# EAGLE board Bulk Board2 (EAGLE 8.4.1)
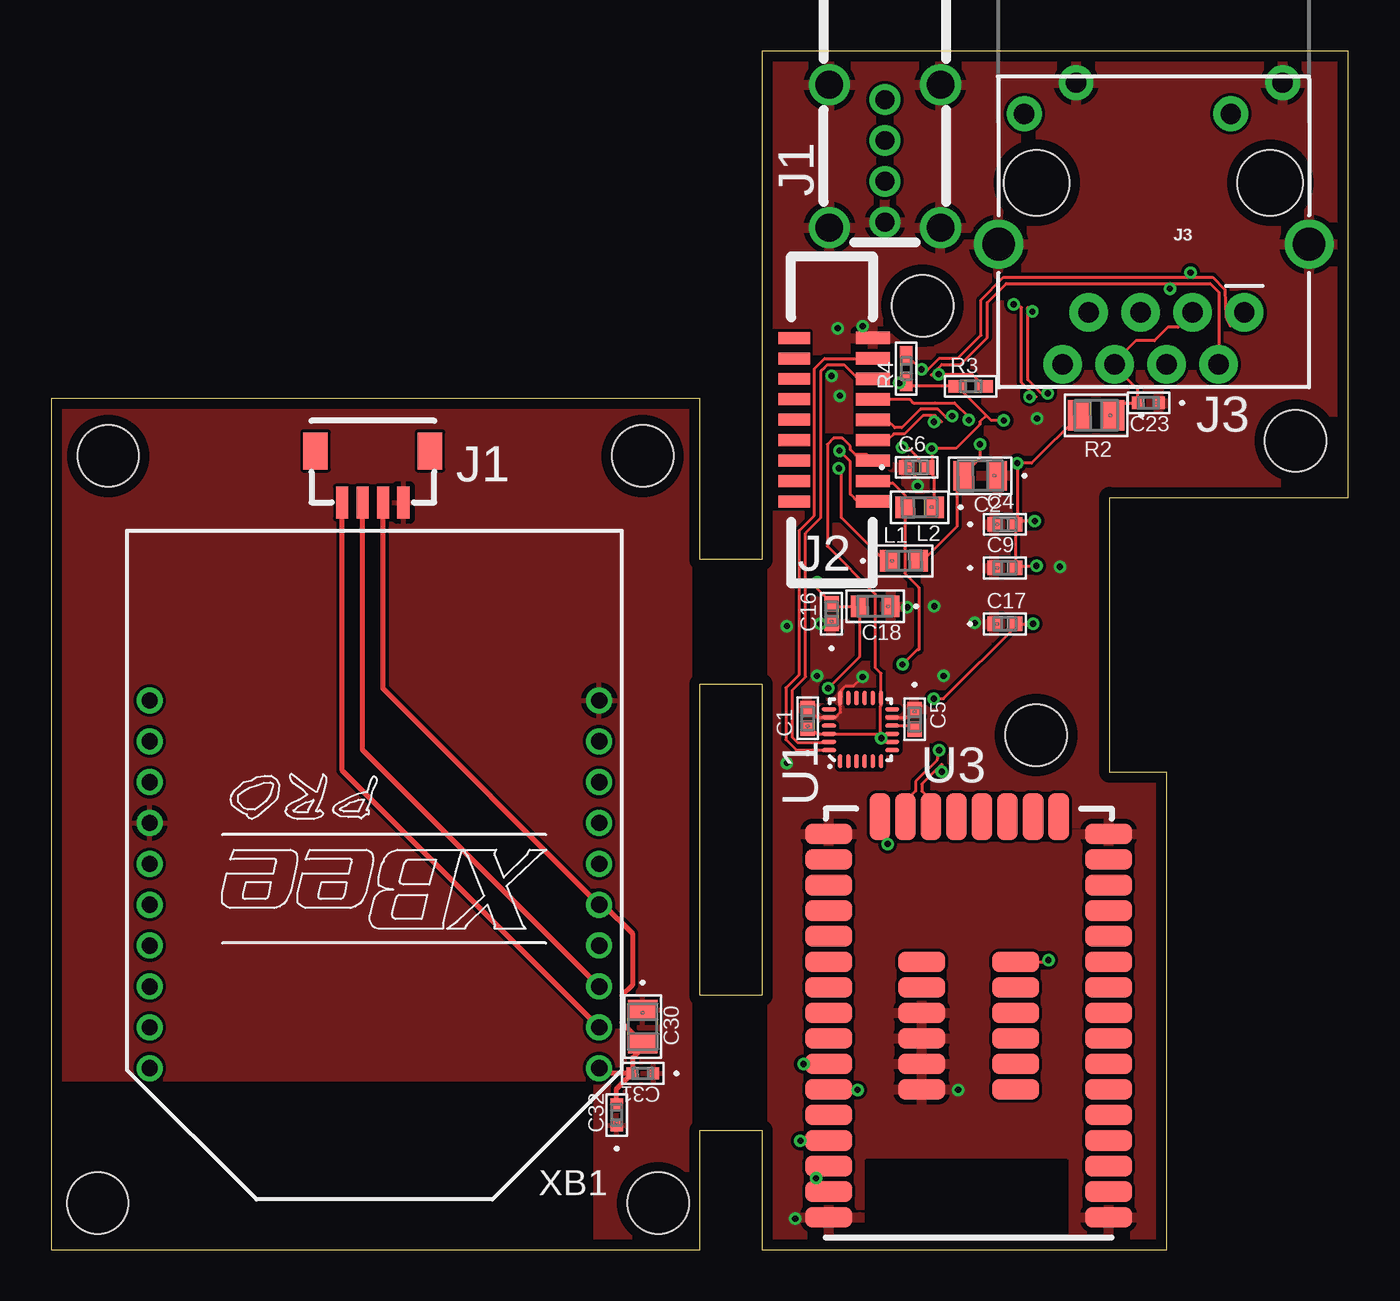
[diagram p0: board, top side]
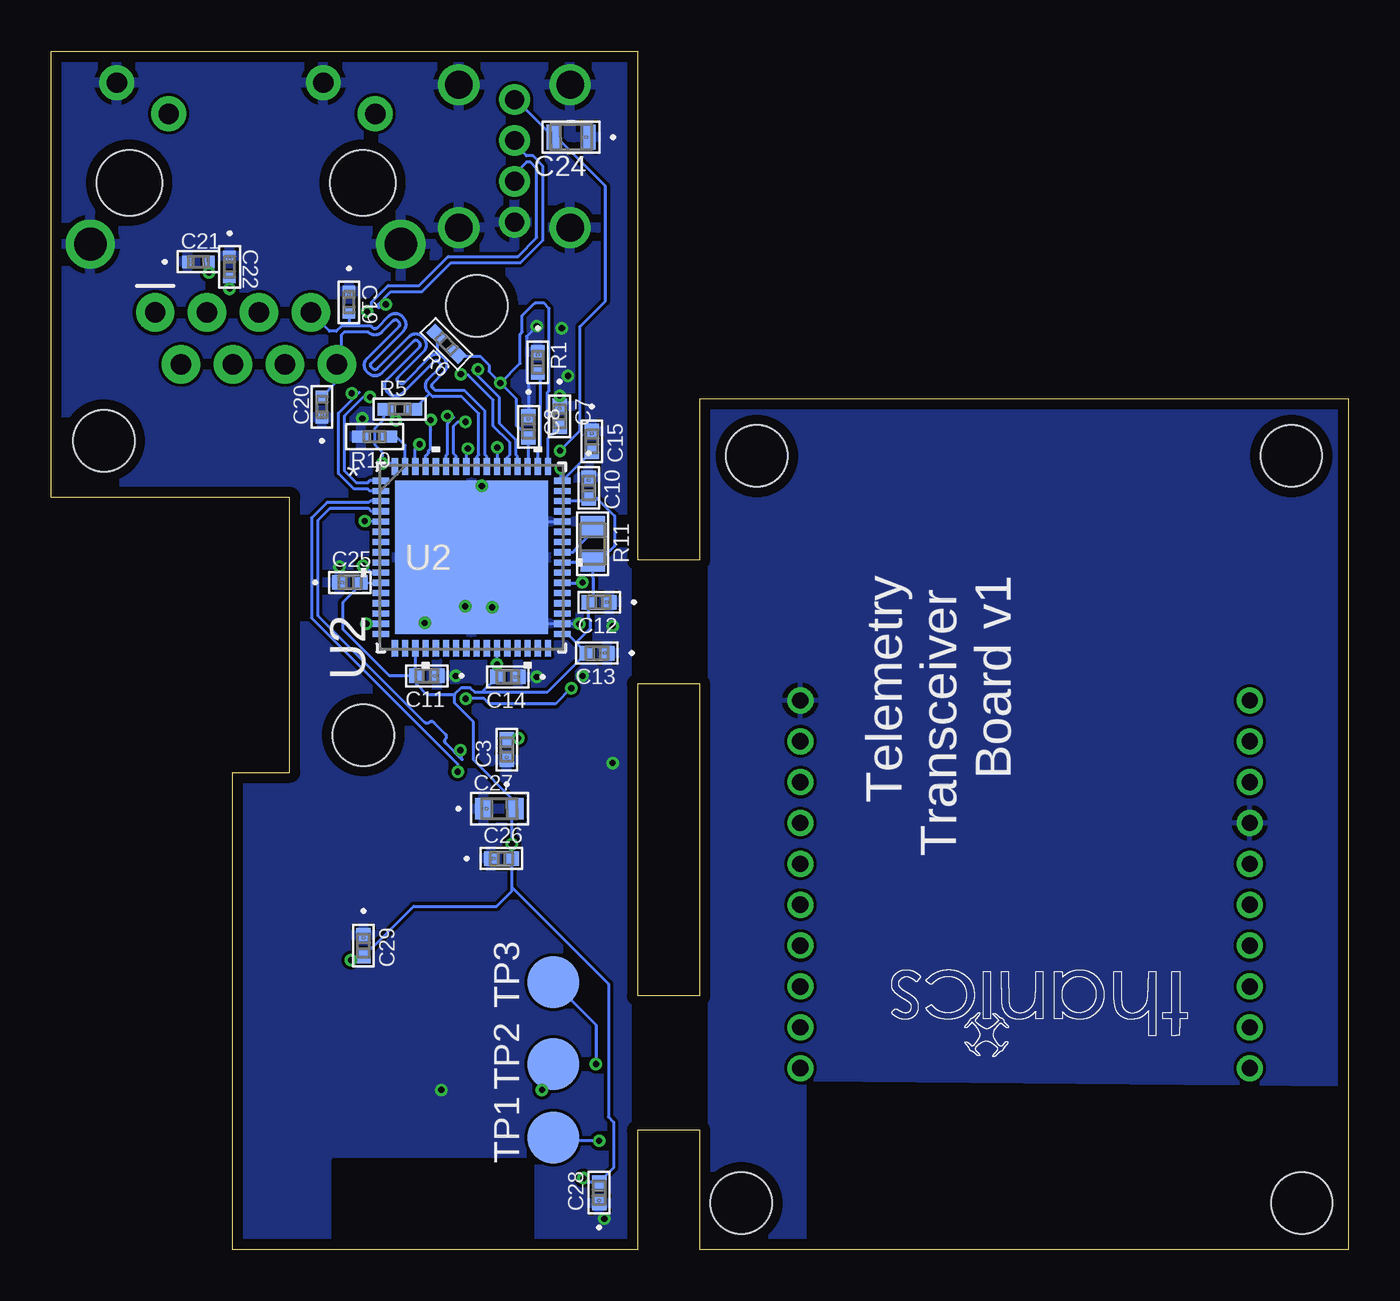
[diagram p1: board, bottom side, seen from below]

Size 63.5 x 58.67 mm. Coordinates in mm from the lower left corner, seen from the top.
Outline: 0,0 31.75,0 31.75,5.84 34.8,5.84 34.8,0 54.61,0 54.61,23.37 51.82,23.37 51.82,36.83 63.5,36.83 63.5,58.67 34.8,58.67 34.8,33.78 31.75,33.78 31.75,41.66 0,41.66 0,0
Outline: 31.75,27.69 34.8,27.69 34.8,12.45 31.75,12.45 31.75,27.69
Copper layers (1*16): Top 0.035mm / dielectric 1.6mm / Bottom 0.035mm
Design rules "Elecrow_2-layer_PCB_eagle_rule": minimum track width 6mil, minimum drill 12mil, track to track 6mil, track to pad 6mil, pad to pad 6mil, via to via 8mil, smd to smd 0mil, copper to edge 20mil, drill to drill 10mil, minimum pad ring 6mil, minimum via ring 6mil, stop-mask expansion 0mil, vias tented up to drill 100mil, thermal gap 10mil
Holes 3 mm at 60.92,39.6 42.65,46.21 48.22,25.19 2.79,38.86 28.96,38.86 29.72,2.29 2.29,2.29
tRestrict: area 39.9,0 to 49.7,4.4; area 0.3,0.3 to 26.4,8.1
bRestrict: area 39.9,0 to 49.7,4.4; area 0.3,0.3 to 26.4,8.1

## Footprints (pad centres in the part's own frame; a part is rotated, then mirrored left to right if it is on the bottom)
0402-M = smd 0.711 x 0.711: 1 -0.508,0; 2 0.508,0
YAG_CC0805 = smd 0.965 x 1.448: 1 -0.826,0; 2 0.826,0
0603-M = smd 0.813 x 1.067: 1 -0.775,0; 2 0.775,0
G-155-M = smd 0.559 x 0.61: 1 -0.521,0; 2 0.521,0
G-21 = smd 0.711 x 1.245: 1 -0.851,0; 2 0.851,0
USB_A_VERTICAL = drill 0.92 pad 1.5: 1 -3,0; 2 -1,0; 3 1,0; 4 3,0 | drill 1.35 pad 2: P$5 -3.73,-2.72; P$6 -3.73,2.72; P$7 3.27,2.72; P$8 3.27,-2.72
9POS_FFC_CONNECTOR = smd 0.6 x 1.65: 1 -7.27,-2; 2 -6.27,-2; 3 -5.27,-2; 4 -4.27,-2; 5 -3.27,-2; 6 -2.27,-2; 7 -1.27,-2; 8 -0.27,-2; 9 0.73,-2 | smd 0.584 x 1.524: P$16 -7.27,1.852; P$17 -6.27,1.852; P$18 -5.27,1.852; P$19 -4.27,1.852; P$20 -3.27,1.852; P$21 -2.27,1.852; P$22 -1.27,1.852; P$23 -0.27,1.852; P$24 0.73,1.852
MAGJACK = drill 1 pad 1.88: 1 -4.445,6.015; 2 -3.175,8.555; 3 -1.905,6.015; 4 -0.635,8.555; 5 0.635,6.015; 6 1.905,8.555; 7 3.175,6.015; 8 4.445,8.555 | drill 1 pad 1.7: 9 -3.785,-3.715; 10 -6.325,-5.235; 11 6.325,-3.715; 12 3.785,-5.235 | drill 1.6 pad 2.184: M1 -7.62,2.67; M2 7.58,2.67 | hole 3.2: -5.715,-0.335; 5.715,-0.335
JST_SH_4POS = smd 0.6 x 1.55: 1 -1.5,0; 2 -0.5,0; 3 0.5,0; 4 1.5,0 | smd 1.2 x 1.8: P$5 -2.8,2.525; P$6 2.8,2.525
IND_BLM18_0603-M = smd 0.914 x 1.041: 1 -0.724,0; 2 0.724,0
YAG_R0402-M = smd 0.66 x 0.66: 1 -0.508,0; 2 0.508,0
STA_RNCP0805-M = smd 1.118 x 1.499: 1 -0.826,0; 2 0.826,0
RC0402N-M = smd 0.864 x 0.61: 1 -0.66,0; 2 0.66,0
RC0805N = smd 1.006 x 1.2: 1 -0.853,0; 2 0.853,0
B2,54 = smd 2.54 x 2.54: TP 0,0
QFN40P300X300X105-25N = smd 0.7 x 0.2: 1 -1.55,1; 2 -1.55,0.6; 3 -1.55,0.2; 4 -1.55,-0.2; 5 -1.55,-0.6; 6 -1.55,-1; 13 1.55,-1; 14 1.55,-0.6; 15 1.55,-0.2; 16 1.55,0.2; 17 1.55,0.6; 18 1.55,1 | smd 0.2 x 0.7: 7 -1,-1.55; 8 -0.6,-1.55; 9 -0.2,-1.55; 10 0.2,-1.55; 11 0.6,-1.55; 12 1,-1.55; 19 1,1.55; 20 0.6,1.55; 21 0.2,1.55; 22 -0.2,1.55; 23 -0.6,1.55; 24 -1,1.55
QFN64_9X9MC-M = smd 0.813 x 0.305: 1 -4.445,3.75; 2 -4.445,3.25; 3 -4.445,2.75; 4 -4.445,2.25; 5 -4.445,1.75; 6 -4.445,1.25; 7 -4.445,0.75; 8 -4.445,0.25; 9 -4.445,-0.25; 10 -4.445,-0.75; 11 -4.445,-1.25; 12 -4.445,-1.75; 13 -4.445,-2.25; 14 -4.445,-2.75; 15 -4.445,-3.25; 16 -4.445,-3.75; 33 4.445,-3.75; 34 4.445,-3.25; 35 4.445,-2.75; 36 4.445,-2.25; 37 4.445,-1.75; 38 4.445,-1.25; 39 4.445,-0.75; 40 4.445,-0.25; 41 4.445,0.25; 42 4.445,0.75; 43 4.445,1.25; 44 4.445,1.75; 45 4.445,2.25; 46 4.445,2.75; 47 4.445,3.25; 48 4.445,3.75 | smd 0.305 x 0.813: 17 -3.75,-4.445; 18 -3.25,-4.445; 19 -2.75,-4.445; 20 -2.25,-4.445; 21 -1.75,-4.445; 22 -1.25,-4.445; 23 -0.75,-4.445; 24 -0.25,-4.445; 25 0.25,-4.445; 26 0.75,-4.445; 27 1.25,-4.445; 28 1.75,-4.445; 29 2.25,-4.445; 30 2.75,-4.445; 31 3.25,-4.445; 32 3.75,-4.445; 49 3.75,4.445; 50 3.25,4.445; 51 2.75,4.445; 52 2.25,4.445; 53 1.75,4.445; 54 1.25,4.445; 55 0.75,4.445; 56 0.25,4.445; 57 -0.25,4.445; 58 -0.75,4.445; 59 -1.25,4.445; 60 -1.75,4.445; 61 -2.25,4.445; 62 -2.75,4.445; 63 -3.25,4.445; 64 -3.75,4.445 | smd 7.493 x 7.493: 65 0,0
WGM110A = smd 2.3 x 1: 1 -6.85,0; 2 -6.85,-1.25; 3 -6.85,-2.5; 4 -6.85,-3.75; 5 -6.85,-5; 6 -6.85,-6.25; 7 -6.85,-7.5; 8 -6.85,-8.75; 9 -6.85,-10; 10 -6.85,-11.25; 11 -6.85,-12.5; 12 -6.85,-13.75; 13 -6.85,-15; 14 -6.85,-16.25; 15 -6.85,-17.5; 16 -6.85,-18.75; 25 6.85,-18.75; 26 6.85,-17.5; 27 6.85,-16.25; 28 6.85,-15; 29 6.85,-13.75; 30 6.85,-12.5; 31 6.85,-11.25; 32 6.85,-10; 33 6.85,-8.75; 34 6.85,-7.5; 35 6.85,-6.25; 36 6.85,-5; 37 6.85,-3.75; 38 6.85,-2.5; 39 6.85,-1.25; 40 6.85,0; 41 -2.3,-6.25; 42 2.3,-6.25; 43 -2.3,-7.5; 44 2.3,-7.5; 45 -2.3,-8.75; 46 2.3,-8.75; 47 -2.3,-10; 48 2.3,-10; 49 -2.3,-11.25; 50 2.3,-11.25; 51 -2.3,-12.5; 52 2.3,-12.5 | smd 1 x 2.3: 17 -4.4,-19.6; 18 -3.15,-19.6; 19 -1.9,-19.6; 20 -0.65,-19.6; 21 0.6,-19.6; 22 1.85,-19.6; 23 3.1,-19.6; 24 4.35,-19.6
XBEE-PRO = drill 0.8 pad 1.27: 1 -11,9; 2 -11,7; 3 -11,5; 4 -11,3; 5 -11,1; 6 -11,-1; 7 -11,-3; 8 -11,-5; 9 -11,-7; 10 -11,-9; 11 11,-9; 12 11,-7; 13 11,-5; 14 11,-3; 15 11,-1; 16 11,1; 17 11,3; 18 11,5; 19 11,7; 20 11,9

## Placement (x,y rotation side)
C1  0.1uF  [0402-M]  37.03,26.01 90 top
C2  1uF  [YAG_CC0805]  45.48,37.89 180 top
C3  0.1uF  [0402-M]  41.2,24.49 90 bottom
C4  0.1uF  [0402-M]  46.69,35.51 0 top
C5  0.1uF  [0402-M]  42.27,25.96 270 top
C6  0.1uF  [0402-M]  42.37,38.3 0 top
C7  0.1uF  [0402-M]  38.61,40.79 270 bottom
C8  0.1uF  [0402-M]  40.13,40.28 270 bottom
C9  0.1uF  [0402-M]  46.69,33.38 0 top
C10  0.1uF  [0402-M]  37.19,37.29 270 bottom
C11  0.1uF  [0402-M]  45.11,28.09 180 bottom
C12  0.1uF  [0402-M]  36.68,31.7 180 bottom
C13  0.1uF  [0402-M]  36.78,29.21 180 bottom
C14  0.1uF  [0402-M]  41.15,28.04 180 bottom
C15  0.1uF  [0402-M]  37.03,39.57 270 bottom
C16  0.1uF  [0402-M]  38.2,31.14 90 top
C17  0.1uF  [0402-M]  46.69,30.63 0 top
C18  4.7uF  [0603-M]  40.34,31.5 180 top
C19  16pF  [G-155-M]  48.92,46.38 270 bottom
C20  16pF  [G-155-M]  50.24,41.25 90 bottom
C21  16pF  [G-155-M]  56.29,48.36 0 bottom
C22  16pF  [G-155-M]  54.76,48.11 270 bottom
C23  22nF  [G-155-M]  53.71,41.45 180 top
C24  22uF  [G-21]  38.05,54.46 180 bottom
C25  0.1uF  [0402-M]  48.87,32.66 0 bottom
C26  0.1uF  [0402-M]  41.45,19.15 0 bottom
C27  4.7uF  [0603-M]  41.55,21.59 0 bottom
C28  0.1uF  [0402-M]  36.68,2.79 90 bottom
C29  0.1uF  [0402-M]  48.21,14.88 270 bottom
C30  1uF  [YAG_CC0805]  28.96,10.92 270 top
C31  16pF  [G-155-M]  28.96,8.64 180 top
C32  16pF  [G-155-M]  27.69,6.6 90 top
J1  [USB_A_VERTICAL]  40.82,53.3 270 top
J2  [9POS_FFC_CONNECTOR]  38.22,43.9 90 top
J3  MAGJACK  [MAGJACK]  53.96,51.89 180 top
J4  [JST_SH_4POS]  15.75,36.58 0 top
L1  FB  [IND_BLM18_0603-M]  41.74,33.72 0 top
L2  FB  [IND_BLM18_0603-M]  42.51,36.35 180 top
R1  12.4k  [YAG_R0402-M]  39.67,43.43 270 bottom
R2  10R  [STA_RNCP0805-M]  51.16,40.84 180 top
R3  49R9  [RC0402N-M]  45.01,42.27 0 top
R4  49R9  [RC0402N-M]  41.86,43.13 90 top
R5  49R9  [RC0402N-M]  46.43,41.15 0 bottom
R6  49R9  [RC0402N-M]  44.15,44.35 135 bottom
R10  12k  [RC0402N-M]  47.66,39.8 180 bottom
R11  10k  [RC0805N]  36.99,34.55 270 bottom
TP1  TPB2,54  [B2,54]  38.92,5.5 90 bottom
TP2  TPB2,54  [B2,54]  38.92,9.1 90 bottom
TP3  TPB2,54  [B2,54]  38.92,13.1 90 bottom
U1  [QFN40P300X300X105-25N]  39.62,25.46 90 top
U2  [QFN64_9X9MC-M]  42.92,33.89 0 bottom
U3  WGM110A  [WGM110A]  44.92,1.6 180 top
XB1  XBEE-PRO  [XBEE-PRO]  15.83,17.89 180 top

## Library data of the parts
C1 C3-C17 C25 C26 C28 C29 = 0.1uF-capacitor-0402; MANUFACTURER_PART_NUMBER: 0402ZD104KAT2A; VENDOR: AVX Corporation
C2 = 1uF X7R Ceramic Capacitor; COPYRIGHT: Copyright C 2015 Accelerated Designs. All rights reserved; MANUFACTURER_PART_NUMBER: CC0805KKX7R7BB105; VENDOR: Vendor
C18 C27 = 4.7uF-capacitor; MANUFACTURER_PART_NUMBER: 06036D475KAT2A; VENDOR: AVX Corporation
C19-C22 = 16pF-capacitor; MANUFACTURER_PART_NUMBER: GRM1555C1H160JA01D; VENDOR: Murata
C23 = 22nF-capacitor; MANUFACTURER_PART_NUMBER: GRM155R71H223KA12D; VENDOR: Murata
C24 = 22uF X5R Ceramic Capacitor; COPYRIGHT: Copyright C 2015 Accelerated Designs. All rights reserved; MANUFACTURER_PART_NUMBER: GRM21BR60J226ME39L; VENDOR: Vendor
C30 = Telemetry Transceiver Board; COPYRIGHT: Copyright C 2015 Accelerated Designs. All rights reserved; MANUFACTURER_PART_NUMBER: CC0805KKX7R7BB105; VENDOR: Vendor
C31 C32 = Telemetry Transceiver Board; MANUFACTURER_PART_NUMBER: GRM1555C1H160JA01D; VENDOR: Murata
J1 J2 J4 U3 = thanics_robotics
J3 = SparkFun-Connectors; PROD_ID: CONN-09556; SF_ID: PRT-08534
L1 L2 = 600ohm-fb; MANUFACTURER_PART_NUMBER: BLM18AG601SN1D; VENDOR: MURATA
R1 = 12.4k-resistor; MANUFACTURER_PART_NUMBER: RC0402FR0712K4L; VENDOR: Yageo
R2 = 10-resistor; COPYRIGHT: Copyright C 2015 Accelerated Designs. All rights reserved; MANUFACTURER_PART_NUMBER: RNCP0805FTD10R0; VENDOR: Vendor
R3-R6 = 49.9-resistor; MANUFACTURER_PART_NUMBER: RC0402FR0749K9L; VENDOR: Yageo
R10 = 12k-resistor; MANUFACTURER_PART_NUMBER: RC0402FR0712KL; VENDOR: Yageo
R11 = 10k-resistor; CASE: 0805 2012 metric; COMPOSITION: Thin Film; COPYRIGHT: Copyright C 2015 Accelerated Designs. All rights reserved; DATASHEET: httpindustrial.panasonic.comwwwcgijvcr13pz.cgi?E+PZ+3+AOA0026+ERA6AEB103V+7+WW; DIGIKEYPARTNUMBER: P10KDATRND; HEIGHT: 0.024" 0.60mm; LEADSTYLE: Surface Mount SMD SMT; MANUFACTURER_PART_NUMBER: ERA6AEB103V; NUMBEROFTERMINATIONS: 2; PACKAGECASE: 0805 2012 Metric; PACKAGING: Tape &amp Reel TR; POWERWATTS: 0.125W 18W; QUANTITY_AVAILABLE: 225000; RESISTANCEINOHMS: 10.0K; RESISTANCEOHMS: 10K; SIZEDIMENSION: 0.079" L x 0.049" W 2.00mm x 1.25mm; TEMPERATURECOEFFICIENT: 25ppm°C; TOLERANCE: 0.1%; VENDOR: Panasonic; VOLTAGEWORKING: 100V
TP1-TP3 = testpad
U1 = ICM-20948-mpu
U2 = lan9512; MANUFACTURER_PART_NUMBER: LAN9512JZX; VENDOR: MICROCHIP
XB1 = xbee; MPN: XBP24-AWI-001; OC_FARNELL: 1337916; OC_NEWARK: 42M2667

## Nets
1.8V: C1.1 C3.2 J2.3 U1.8 U1.9 U1.13 U1.22
3.3V_A: C4.2 C6.2 C7.2 C8.2 C9.2 L2.1 R2.2 R3.1 R4.1 R5.1 R6.1 U2.5 U2.10 U2.49 U2.51 U2.54 U2.57 U2.64
+3V1: C30.2 C31.2 C32.2 J4.3 XB1.1 XB1.5
+3V3: C10.2 C11.2 C12.2 C13.2 C14.2 C25.2 C26.2 C27.2 C28.2 C29.2 J2.2 L2.2 R11.2 U2.11 U2.12 U2.19 U2.27 U2.33 U2.39 U2.40 U2.46 U3.24 U3.38 U3.39 U3.51
+5V: C24.2 J1.1 J2.1
GND: C1.2 C2.1 C3.1 C4.1 C5.1 C6.1 C7.1 C8.1 C9.1 C10.1 C11.1 C12.1 C13.1 C14.1 C15.1 C16.1 C17.1 C18.1 C19.1 C20.1 C21.1 C22.1 C23.1 C24.1 C25.1 C26.1 C27.1 C28.1 C29.1 J1.4 J1.P$5 J1.P$6 J1.P$7 J1.P$8 J2.9 J3.10 J3.12 J3.M1 J3.M2 R1.1 R10.2 U1.11 U1.18 U1.20 U2.34 U2.44 U2.65 U3.1 U3.16 U3.25 U3.40 U3.42 U3.44 U3.46 U3.48
GND1: C30.1 C31.1 C32.1 J4.4 XB1.10 XB1.14
GPCLK: J2.6 U2.61
N$1: R11.1 U2.41
N$2: R10.1 U2.63
N$3: C15.2 L1.1 U2.48
N$4: C2.2 L1.2 U2.62
N$7: TP1.TP U3.37
N$8: TP2.TP U3.35
N$9: TP3.TP U3.34
N$10: J3.11
N$11: C5.2 U1.10
N$12: J3.9
N$14: R1.2 U2.50
N$15: C16.2 C17.2 C18.2 U2.15 U2.38
N$16: C23.2 J3.3 J3.6 R2.1
RX: J4.2 XB1.3
RX_N: C22.2 J3.2 R3.2 U2.53
RX_P: C21.2 J3.1 R4.2 U2.52
SCL: J2.7 U1.23
SDA: J2.8 U1.24
TX: J4.1 XB1.2
TX_N: C20.2 J3.8 R5.2 U2.56
TX_P: C19.2 J3.7 R6.2 U2.55
USB_D2_N: J1.2 U2.1
USB_D2_P: J1.3 U2.2
USB_D3_N: U2.3 U3.22
USB_D3_P: U2.4 U3.23
USB_D_N: J2.4 U2.58
USB_D_P: J2.5 U2.59

## Tracks (layer width: path | path; a pad name or v marks a point on that pad's centre or on a via)
1.8V  (via drill 0.3)
  Top 0.152: v40.64,25.04 40.83,24.86 U1.8 | U1.9 40.85,25.26 v40.64,25.04 | 40.59,25.25 40.59,26.59 40.62,26.62 U1.13 40.62,28.21 40.34,28.5 40.34,32.11 38,34.44 38,39.42 38.3,39.73 38.73,39.73 39.12,39.34 39.12,39.16 39.37,38.91 39.94,38.91 J2.3 | 40.59,25.25 40.59,25.09 v40.64,25.04 | C1.1 37.24,25.5 37.49,25.25 38.06,25.25 U1.22 40.58,25.26 40.59,25.25
  Bottom 0.152: C3.2 41.15,25.04 v40.64,25.04
3.3V_A  (via drill 0.3)
  Top 0.152: C6.2 42.77,38.3 43.24,37.84 L2.1 | C6.2 43.1,38.58 v43.1,39.22 44.28,39.22 45.46,40.39 45.46,40.53 45.77,40.84 | C4.2 47.3,35.61 v47.3,38.51 47.99,38.51 R2.2 | v48.15,35.67 47.35,35.67 C4.2 | C4.2 C9.2 47.3,33.48 v48.23,33.48 | 41.88,42.45 42.11,42.27 R3.1 45.77,40.84 | 41.88,42.45 R4.1 | C6.2 42.44,38.73 42.44,38.75 41.93,39.27 v41.66,39.27 | v41.51,42.43 41.86,42.43 41.88,42.45 | v46.63,40.59 46.02,40.59 45.77,40.84
  Bottom 0.152: U2.51 40.13,38.38 C8.2 40.56,40.21 40.58,40.21 40.72,40.34 40.72,41.63 v41.51,42.43 | U2.54 41.67,39.25 v41.66,39.27 | U2.57 43.17,39.15 v43.1,39.22 | U2.64 46.84,38.51 v47.3,38.51 47.3,39.04 47.66,39.41 47.66,40.2 47.24,40.62 R5.1 47.09,41.05 v46.63,40.59 | U2.5 48.12,35.64 v48.15,35.67 | v41.51,42.43 42.07,42.99 42.07,43.31 42.49,43.73 43.53,43.73 R6.1 | v48.23,33.48 48,33.25 47.91,33.25 47.81,33.14 U2.10 | U2.49 39.17,39.72 39.12,39.78 | 39.12,39.78 C7.2 | 39.12,39.78 39.12,40.77 39.19,40.85 39.19,41.98 39.12,42.05 39.12,46.08 39.37,46.33 39.83,46.33 40.44,45.72 40.44,44.93 40.54,44.83 40.54,43.4 v41.51,42.43
+3V1
  Top 0.254: C31.2 28.45,9.4 28.96,9.91 C30.2 27.94,11.11 27.94,12.45 28.45,12.95 28.45,15.49 27.05,16.89 XB1.5 16.25,27.47 J4.3 | C32.2 27.69,7.89 C31.2 | C31.2 27.08,8.64 XB1.1
+3V3  (via drill 0.3)
  Top 0.152: J2.2 40.31,37.54 41.2,37.54 41.79,36.95 L2.2 41.79,34.34 41.78,34.34 41.78,33.1 42.47,32.42 42.47,29.36 42.38,29.36 v41.67,28.65 | U3.24 40.95,20.82 v40.95,19.86 | U3.51 48.74,14.1 v48.82,14.17 | U3.39 37.44,3.48 v37.44,3.5 37.47,3.5 U3.38
  Bottom 0.152: U2.19 45.67,28.15 C11.2 | U2.33 38.22,30.14 37.77,29.69 | 37.77,29.69 C13.2 39.22,27.28 42.42,27.28 | U2.39 U2.40 37.05,33.64 R11.2 36.99,33.63 | 37.77,29.69 37.77,29.75 37.11,30.41 37.11,30.85 37.19,30.93 C12.2 36.96,31.93 36.96,32.88 36.99,32.92 36.99,33.63 | U2.27 v41.67,28.65 41.67,28.06 C14.2 42.42,27.28 | C11.2 45.62,27.69 45.11,27.18 43.74,27.18 | C11.2 46.94,28.09 49.23,30.38 49.23,31.69 48.26,32.66 C25.2 47.4,32.61 U2.11 U2.12 | U2.46 37.32,36.64 C10.2 36.78,36.78 35.92,35.92 35.92,34.44 36.47,33.88 36.74,33.88 36.99,33.63 | v48.82,14.17 48.41,14.17 C29.2 47.78,14.81 47.76,14.81 45.75,16.82 41.71,16.82 40.95,17.58 40.95,17.73 | v37.44,3.5 37.24,3.3 C28.2 35.97,4.01 35.97,6.25 36.22,6.5 36.22,13.01 40.95,17.73 | 40.95,17.73 C26.2 v40.95,19.86 40.95,21.43 C27.2 40.78,21.93 42.82,23.98 42.82,25.84 43.74,26.75 43.74,27.18 | 42.42,27.28 42.76,27.28 42.98,27.51 43.43,27.51 43.74,27.2 43.74,27.18
+5V  (via drill 0.3)
  Top 0.152: J2.1 39.47,36.63 39.12,36.98 | 39.12,36.98 | 39.12,36.98 39.12,38.58 v38.59,39.12
  Bottom 0.152: J1.1 40.74,56.3 C24.2 38.76,54.46 36.37,52.07 36.37,46.44 37.62,45.19 37.62,40.09 v38.59,39.12
GND  (via drill 0.3)
  Top 0.152: C6.1 42.29,37.87 42.29,37.85 42.42,37.73 v42.42,37.39 | U1.11 41.86,26.06 C5.1 | C1.2 37.47,26.09 37.48,26.09 37.51,26.06 U1.20 38.38,26.06 38.65,26.32 38.65,26.59 38.62,26.62 U1.18 38.69,27.08 38.69,27.39 38.88,27.59 39.27,27.59 v39.73,28.04 | C18.1 41.16,31.45 v41.91,31.45
  Bottom 0.152: U2.65 41.17,35.64 U2.44 | U2.65 39.67,30.64 U2.34 37.65,30.64 v37.64,30.63 | U2.65 42.92,32.46 v41.91,31.45 | C7.1 v38.61,41.81 | C8.1 40.13,42.4 40.23,42.5 40.23,44.7 v39.73,45.21
  other vias: 43.69,28.09 36.02,30.53 36.02,23.83 48.26,40.69 38.51,45.11 36.42,1.52 44.4,7.82 45.21,30.68 37.49,28.09 49.38,33.43 43.23,31.5 38.2,42.77
  pour Top: 35.31,-2.65 35.31,58.35 63.42,58.6 63.42,-2.4
  pour Bottom: 35.31,-2.4 35.31,58.6 63.42,58.6 63.42,-2.4
GND1
  pour Top: 0.25,41.4 31.24,41.4 31.24,0.25 0.25,0.25
  pour Bottom: 0.25,41.4 31.24,41.4 31.24,0.25 0.25,0.25
GPCLK  (via drill 0.3)
  Top 0.152: J2.6 42.04,41.63 42.22,41.45 43.27,41.45 | 43.27,41.45 | 43.27,41.45 44.22,41.45 44.92,40.75 v44.92,40.61
  Bottom 0.152: U2.61 45.17,38.86 45.01,39.02 45.01,39.12 44.93,39.2 44.93,40.12 44.92,40.13 v44.92,40.61
N$1
  Bottom 0.152: R11.1 36.99,35.13 37.82,34.3 37.82,34.26 37.95,34.14 U2.41
N$2
  Bottom 0.152: U2.63 46.17,39.36 46.61,39.8 R10.1
N$3  (via drill 0.3)
  Top 0.152: L1.1 40.8,33.72 38.68,35.84 38.68,38.13 v38.56,38.25
  Bottom 0.152: C15.2 37.59,38.53 U2.48 38.56,37.73 v38.56,38.25
N$4  (via drill 0.3)
  Top 0.152: v45.47,39.42 45.47,38.76 C2.2 44.35,37.58 44.35,35.41 42.66,33.72 L1.2
  Bottom 0.152: U2.62 45.67,39.22 v45.47,39.42
N$7  (via drill 0.3)
  Top 0.152: U3.37 36.69,5.35 v36.68,5.33
  Bottom 0.152: v36.68,5.33 38.75,5.33 TP1.TP
N$8  (via drill 0.3)
  Top 0.152: v39.47,7.82 38.09,7.82 U3.35
  Bottom 0.152: TP2.TP 38.92,8.38 v39.47,7.82
N$9  (via drill 0.3)
  Top 0.152: v36.83,9.09 v36.84,9.1 U3.34
  Bottom 0.152: TP3.TP 36.83,11.01 v36.83,9.09
N$11
  Top 0.152: U1.10 42.06,25.66 C5.2
N$14
  Bottom 0.152: U2.50 39.67,39.2 39.55,39.33 39.55,42.8 R1.2
N$15  (via drill 0.3)
  Top 0.152: v37.49,32.66 37.49,32.36 C16.2 38.35,31.5 C18.2 39.56,29.01 v38.04,27.49 | 47.35,30.63 C17.2 | 47.35,30.63 v48.06,30.63 v48.07,30.64 | v43.2,26.98 43.69,26.98 47.35,30.63
  Bottom 0.152: U2.38 37.51,32.64 v37.49,32.66 | v48.07,30.64 U2.15 | v38.04,27.49 38.81,26.72 42.06,26.72 42.32,26.98 v43.2,26.98
N$16
  Top 0.152: J3.3 55.15,45.16 54.66,45.16 54,44.5 53.09,44.5 52.17,43.59 52.05,43.59 J3.6 52.05,43.25 53.19,42.11 C23.2 52.59,41.45 R2.1
RX
  Top 0.254: XB1.3 15.25,24.47 J4.2
RX_N  (via drill 0.3)
  Top 0.152: 54.76,47.3 46.75,47.3 45.82,46.37 45.82,44.64 44.51,43.33 43.6,43.33 43.09,42.82 v43.45,42.86 45.08,42.86 R3.2 | 54.76,47.3 56.73,47.3 57.15,46.88 57.15,43.35 J3.2 | v54.76,47.04 54.76,47.3
  Bottom 0.152: U2.53 41.17,38.79 41.05,38.91 41.05,39.51 41.86,40.32 41.86,41.59 43.09,42.82 v43.45,42.86 | C22.2 v54.76,47.04
RX_P  (via drill 0.3)
  Top 0.152: 55.78,47.6 56.86,47.6 57.45,47 57.51,45.67 57.71,45.21 58.37,45.88 J3.1 | v55.78,47.83 55.78,47.6 | 55.78,47.6 46.62,47.6 45.52,46.49 45.52,44.77 44.39,43.64 43.47,43.64 42.87,43.03 v42.61,43.09 R4.2
  Bottom 0.152: U2.52 40.67,38.84 40.74,38.91 40.74,39.64 41.55,40.45 41.55,41.72 42.87,43.03 v42.61,43.09 | C21.2 55.77,47.84 v55.78,47.83
SCL
  Top 0.152: U1.23 38.05,24.84 36.52,24.84 36.27,25.09 36.27,27.38 36.93,28.04 36.93,35.08 37.67,35.82 37.67,43 37.85,43.18 37.98,43.31 38.83,43.31 39.51,42.63 J2.7
SDA
  Top 0.152: U1.24 36.48,24.46 35.97,24.97 35.97,27.51 36.63,28.17 36.63,35.21 37.36,35.95 37.36,43.13 37.87,43.63 J2.8
TX
  Top 0.254: XB1.2 14.25,23.47 J4.1
TX_N
  Bottom 0.152: U2.56 42.67,38.81 42.57,38.91 42.57,40.93 43.4,41.76 44.82,41.76 44.96,41.9 | 44.96,41.9 45.04,41.98 arc90 45.04,42.62 44.47,43.19 arc-90 44.47,43.4 44.54,43.47 arc-90 44.76,43.47 46.32,41.91 arc90 46.96,41.91 47.03,41.98 arc90 47.03,42.63 45.47,44.19 arc-90 45.47,44.4 45.54,44.47 arc-90 45.76,44.47 47.32,42.91 arc90 47.96,42.91 48.03,42.98 arc90 48.03,43.63 46.47,45.19 arc-90 46.47,45.4 46.54,45.47 arc-90 46.76,45.47 47.32,44.91 arc90 47.97,44.91 49.16,44.91 49.3,44.77 49.3,43.55 J3.8 49.51,42.5 C20.2 | R5.2 45.72,41.15 44.96,41.9
TX_P
  Bottom 0.152: U2.55 42.17,38.82 42.27,38.91 42.27,41.06 43.27,42.06 44.69,42.06 44.82,42.19 arc90 44.82,42.41 44.26,42.97 arc-90 44.26,43.62 44.32,43.69 | J3.7 49.87,44.96 49.54,44.96 49.29,45.21 48.92,45.21 | 44.32,43.69 arc-90 44.97,43.69 46.23,42.43 arc90 46.45,42.43 46.52,42.49 arc90 46.52,42.71 45.26,43.97 arc-90 45.26,44.62 45.32,44.69 arc-90 45.97,44.69 47.53,43.13 arc90 47.75,43.13 47.82,43.2 arc90 47.82,43.41 46.26,44.97 arc-90 46.26,45.62 46.32,45.69 arc-90 46.97,45.69 47.54,45.12 arc90 47.75,45.12 47.84,45.21 48.92,45.21 | R6.2 44.61,43.98 44.32,43.69 | C19.2 48.92,45.21
USB_D2_N  (via drill 0.3)
  Top 0.152: v47.89,41.74 48.2,41.75 47.5,42.46 47.5,46.13 v47.12,46.28
  Bottom 0.152: U2.1 47.9,37.64 48.01,37.54 48.55,37.54 49.12,38.11 49.12,40.83 48.2,41.75 v47.89,41.74 | v47.12,46.28 47.5,46.13 47.5,46.27 46.88,46.89 45.35,46.89 43.93,48.31 40.53,48.31 39.42,49.42 39.42,53.05 39.92,53.54 40.23,53.54 40.82,54.13 J1.2
USB_D2_P  (via drill 0.3)
  Top 0.152: v48.78,41.92 48.42,41.97 47.8,42.58 47.8,46.13 v48.03,45.92
  Bottom 0.152: U2.2 47.91,37.14 48.01,37.24 48.68,37.24 49.43,37.99 49.43,40.96 48.42,41.97 v48.78,41.92 | v48.03,45.92 47.8,46.13 47.8,46.39 47,47.19 45.48,47.19 44.06,48.62 40.65,48.62 39.73,49.54 39.73,52.92 40.04,53.24 40.23,53.24 40.82,52.66 J1.3
USB_D3_N  (via drill 0.3)
  Top 0.152: v43.6,23.4 43.59,23.77 42.62,22.8 42.62,22.45 42.88,22.2 42.98,22.2 43.07,22.11 U3.22
  Bottom 0.152: U2.3 47.89,36.64 47.95,36.58 50,36.58 50.75,35.83 50.75,30.93 45.42,25.6 44.41,24.58 43.59,23.77 v43.6,23.4
USB_D3_P  (via drill 0.3)
  Top 0.152: v43.47,24.45 43.38,23.98 42.32,22.92 42.32,22.45 41.91,22.05 41.86,22.05 41.82,22 U3.23
  Bottom 0.152: U2.4 47.83,36.14 47.95,36.27 49.87,36.27 50.44,35.7 50.44,31.05 45.21,25.81 arc-90 44.99,25.81 arc90 44.77,25.81 44.19,25.23 arc90 44.19,25.01 arc-90 44.19,24.8 43.38,23.98 v43.47,24.45
USB_D_N  (via drill 0.3)
  Top 0.152: v43.22,40.52 43.58,40.53 43.27,40.84 42.68,40.84 41.77,39.93 41.25,39.93 41,39.67 40.27,39.67 J2.4
  Bottom 0.152: U2.58 43.67,38.85 43.79,38.96 43.79,40.32 43.58,40.53 v43.22,40.52
USB_D_P  (via drill 0.3)
  Top 0.152: v44.11,40.81 43.8,40.75 43.4,41.15 42.56,41.15 41.64,40.23 41.3,40.23 40.89,40.64 40.88,40.63 J2.5
  Bottom 0.152: U2.59 44.17,38.89 44.09,38.96 44.09,40.45 43.8,40.75 v44.11,40.81

## Text on the board
tPlace: J1 | J3 | J1 | J2 | U1 | U3
bPlace: Telemetry / Transceiver / Board v1 | U2